# Altium PCB PCB_BrushlessDrive.PcbDoc
Units mm, origin at the board's own origin, x right, y up, seen from the top; angles counter-clockwise.
Board outline 38.28 x 56.75 mm, 4 copper layers (Top Layer, Internal Plane 1, Internal Plane 2, Bottom Layer), stack 0.778 mm thick; 13 components, 19 nets, 124 pads, 3 vias.
Unrouted connection lines stored in the file: 4.
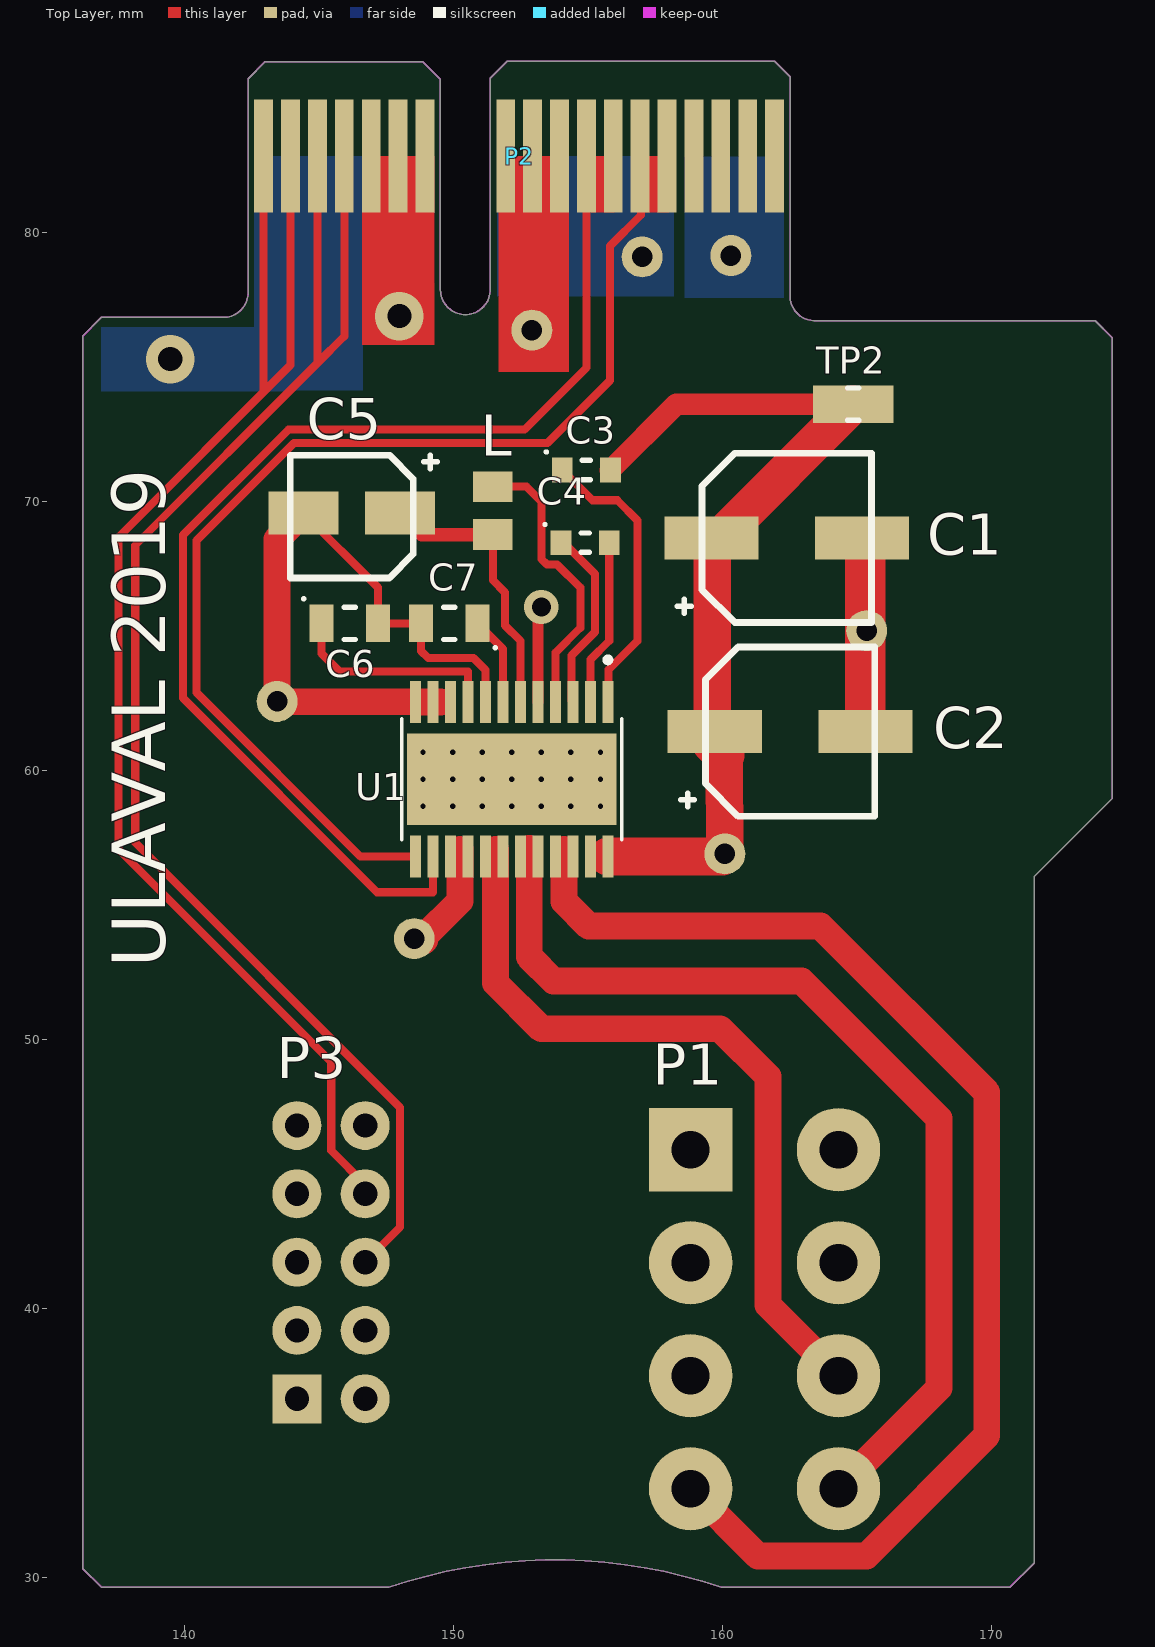
[diagram p0: Top Layer view]
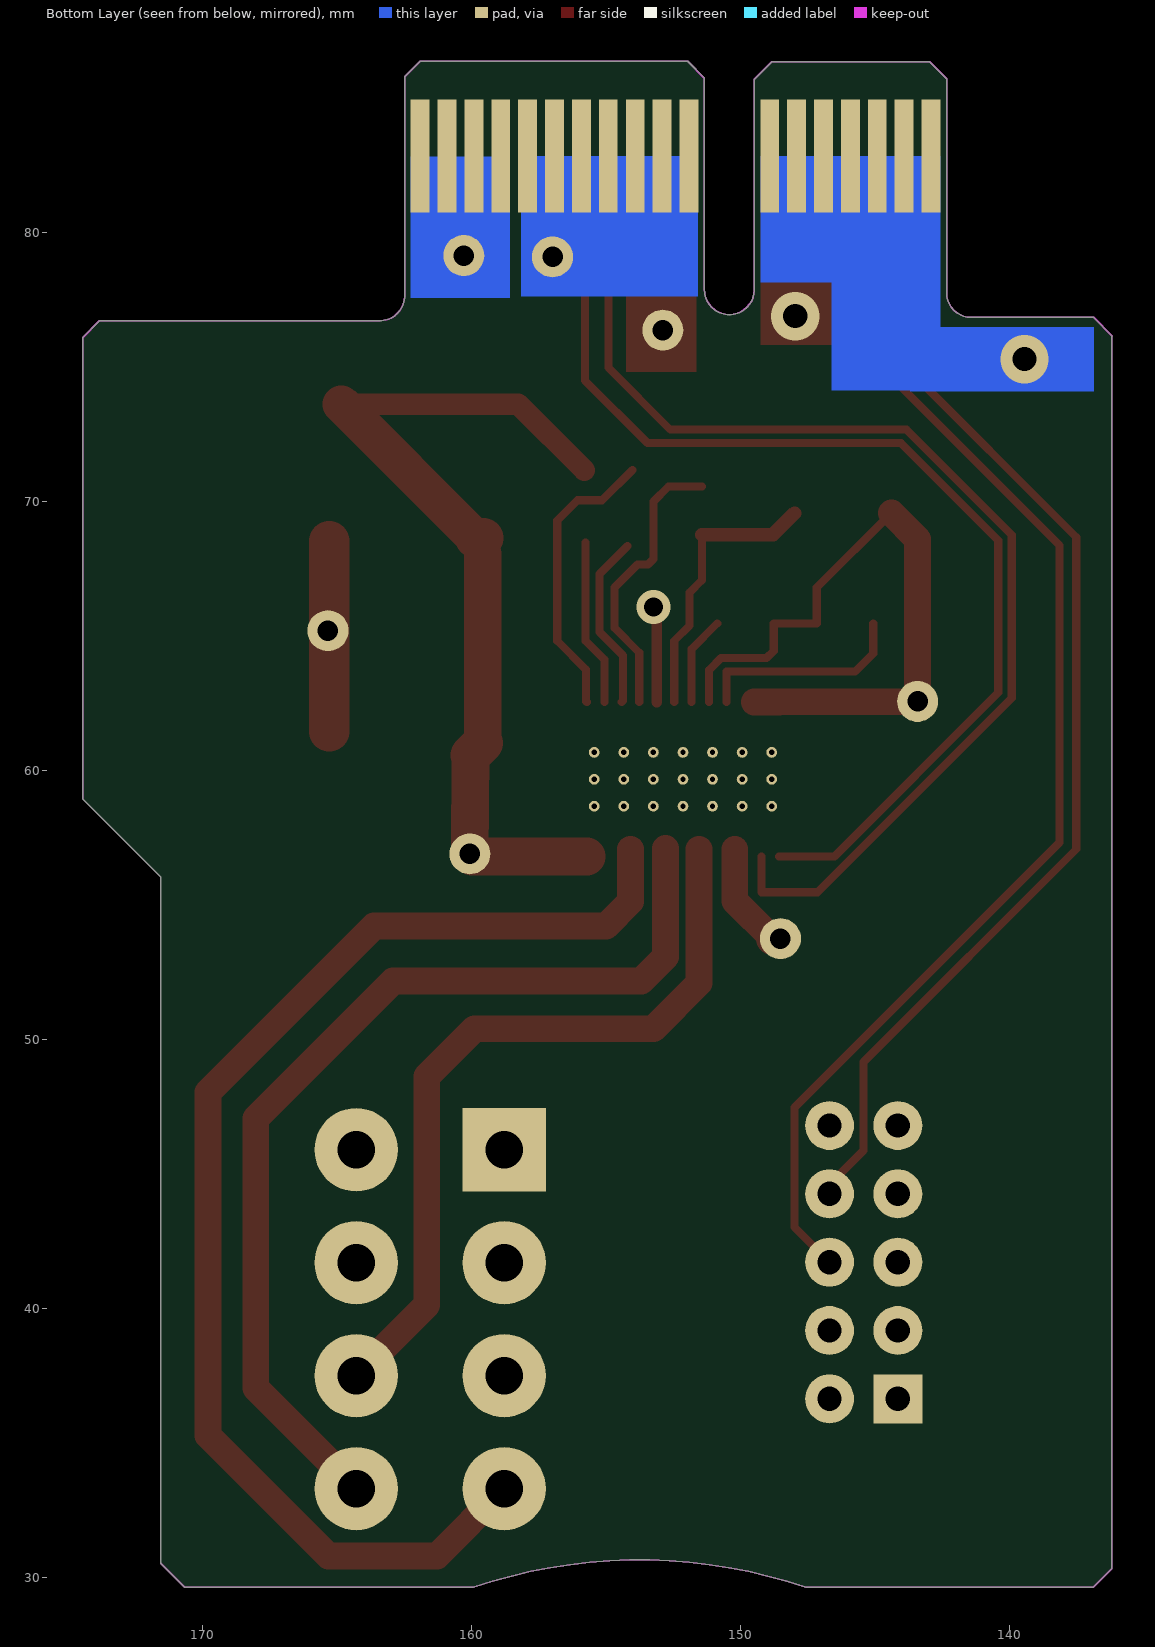
[diagram p1: Bottom Layer view, seen from below]
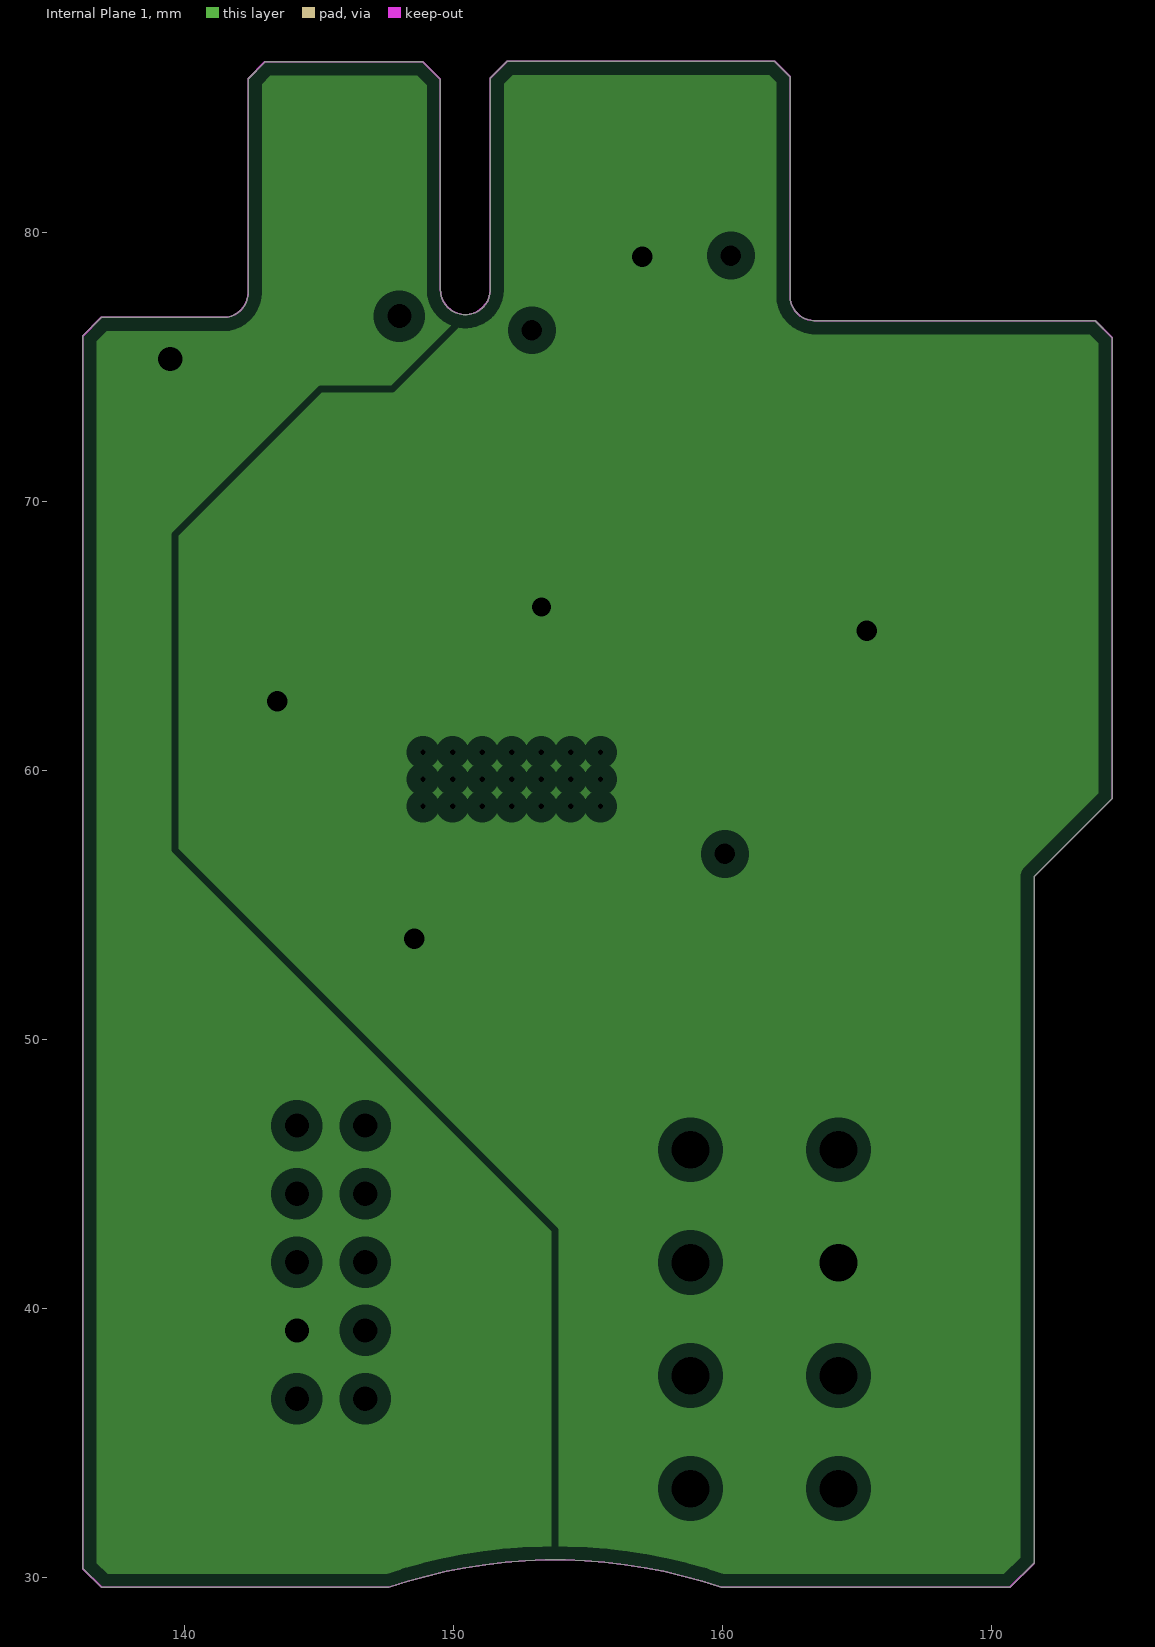
[diagram p2: Internal Plane 1, clearances drawn from the general rule]
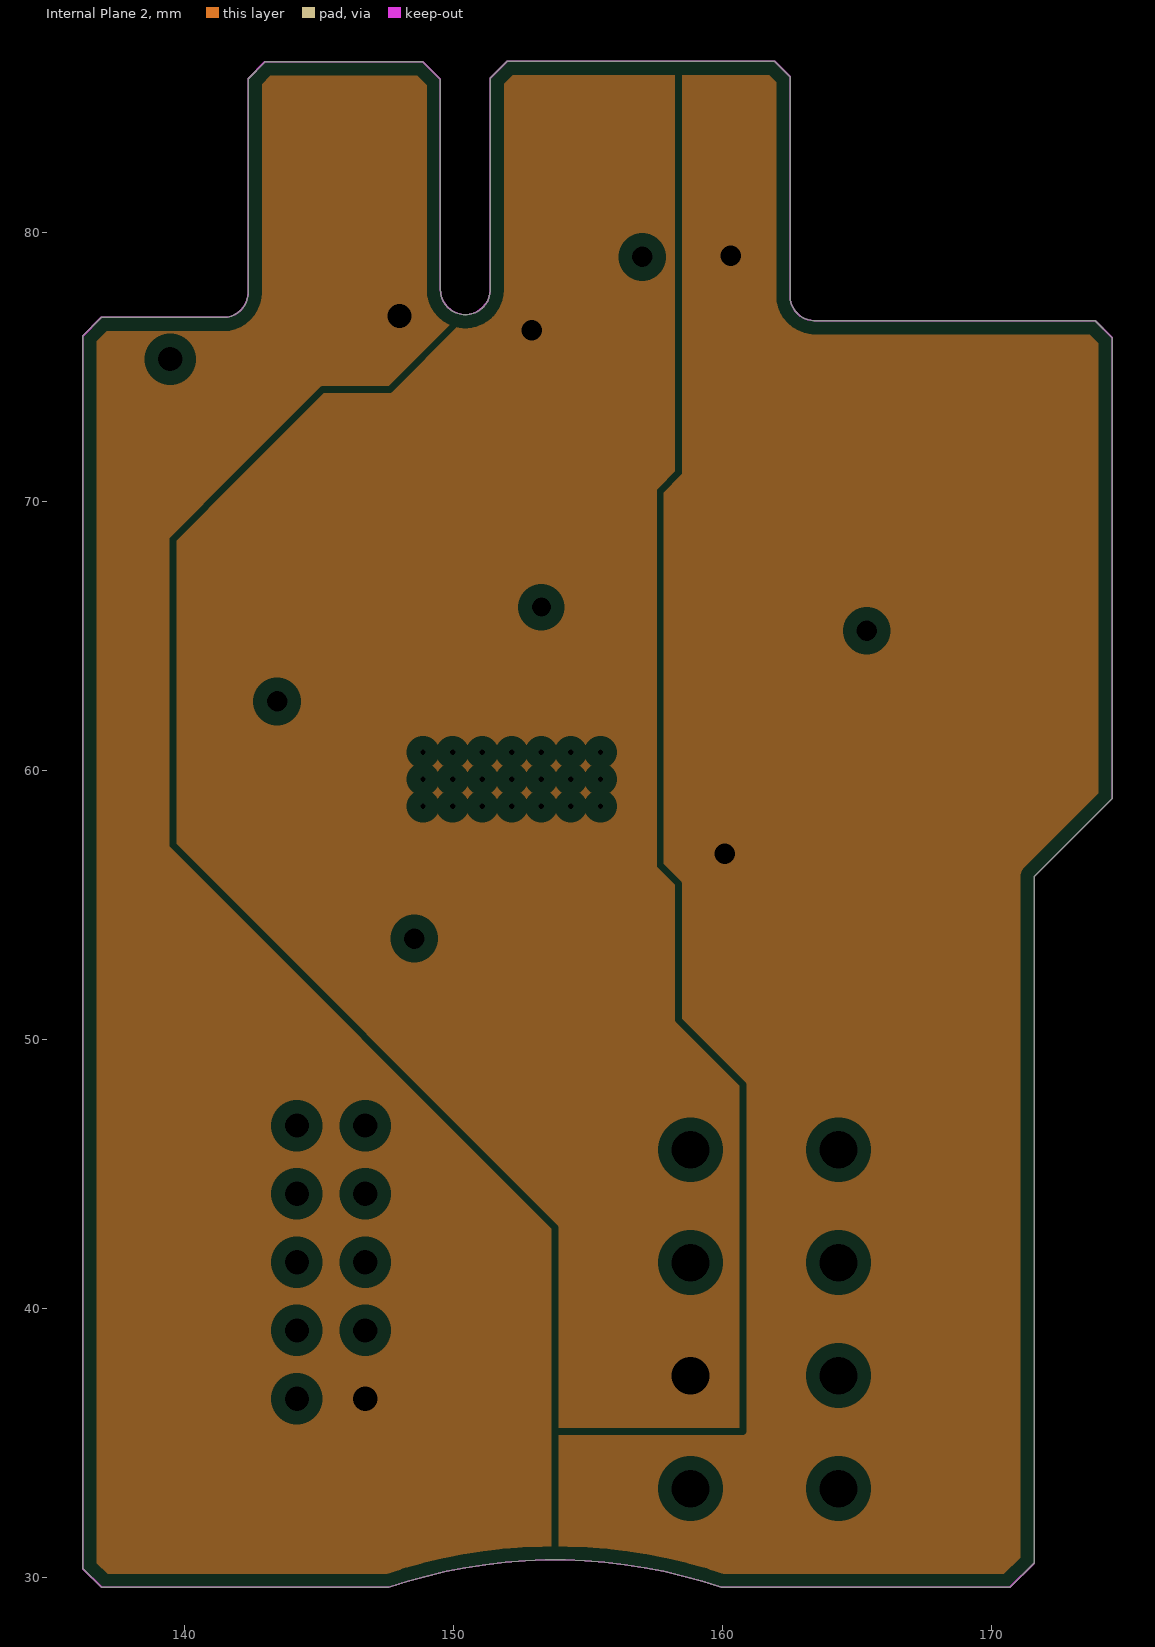
[diagram p3: Internal Plane 2, clearances drawn from the general rule]

## Layer stack, top to bottom
Top Solder: solder mask 0.0102, Solder Resist, Dk 3.5
Top Layer: signal copper 0.0356
Dielectric1: core 0.254, FR-4, Dk 4.2
Internal Plane 1: plane copper 0.036, net (Multiple Nets)
Dielectric 3: prepreg 0.127, Dk 4.2
Internal Plane 2: plane copper 0.036, net (Multiple Nets)
Dielectric 2: core 0.254, Dk 4.2
Bottom Layer: signal copper 0.0356
Bottom Solder: solder mask 0.0102, Solder Resist, Dk 3.5

## Board outline
136.2,30.325 136.9,29.625 147.575,29.625 cw(c153.763,11.462) 159.95,29.625 170.675,29.625 171.575,30.525 171.575,56.05 174.475,58.95 174.475,76.1 173.85,76.725 163.4,76.725 163.425,76.725 cw(c163.425,77.65) 162.5,77.65 162.5,77.625 162.5,85.8 161.925,86.375 151.975,86.375 151.35,85.75 151.35,77.875 cw(c150.425,77.875) 150.425,76.95 cw(c150.425,77.875) 149.5,77.875 149.5,85.7 148.85,86.35 142.975,86.35 142.35,85.725 142.35,77.775 cw(c141.425,77.775) 141.425,76.85 136.884,76.85 136.192,76.158 136.2,76.15

## Design rules (kind name [scope] priority, off if disabled: settings)
Clearance polygon [InPolygon] p1: gap=0.5 ignorepadtopadclearanceinfootprint=FALSE except(0: Arc-Hole Track-Hole SMDPad-Hole THPad-Hole Via-Hole Fill-Hole Poly-Hole Region-Hole Text-Hole)
Clearance [All] p2: gap=0.2 ignorepadtopadclearanceinfootprint=FALSE except(0: Arc-Hole Track-Hole SMDPad-Hole THPad-Hole Via-Hole Fill-Hole Poly-Hole Region-Hole Text-Hole)
PlaneClearance [All] p1: clearance=0.508
PlaneConnect [All] p1: planeconnectstyle=Relief reliefexpansion=0.508 reliefentries=4 reliefconductorwidth=0.5 reliefairgap=0.254
PolygonConnect [All] p1: connectstyle=Relief reliefconductorwidth=0.5 reliefentries=4 polygonreliefangle="90 Angle" airgapwidth=0.254
RoutingVias "RoutingVias Power" [InNet('PGND','DGND','P1','P2','P3')] p1: holewidth=1.6 width=3.2 viastyle="Through Hole" minholewidth=0.9 minwidth=1.8 maxholewidth=1.6 maxwidth=3.2
RoutingVias [All] p2: holewidth=0.6 width=1.2 viastyle="Through Hole" minholewidth=0.35 minwidth=0.7 maxholewidth=0.6 maxwidth=1.2
SolderMaskExpansion [All] p1: expansion=0.102
Width "Power width" [InNet('PGND','VPOWER','P1','P2','P3')] p1: maxlimit=5 minlimit=0.2 preferedwidth=3 minimp=50.000000 maximp=50.000000 favimp=50.000000
Width [All] p2: maxlimit=1.2 minlimit=0.3 preferedwidth=0.6
28 further rules are at their usual default settings.

## Classes and differential pairs
component class Drive: C2 C3 C4 C5 C6 C7 L TP2 U1 U?
component class BrushlessDrive: P1 P2 P3

## Components (designator, comment, footprint, x,y, rotation, side; value= is the part's Value field where it differs from the comment)
C1 "865080645012" "CAP 6.6x6.6mm" 162.375,68.65 r180 top
C2 "865080645012" "CAP 6.6x6.6mm" 162.5,61.45 r180 top
C3 "CL10B104KB8SFNC" 0603 154.925,71.175 r0 top
C4 "CL10B104KB8SFNC" 0603 154.88,68.475 r0 top
C5 "865230340001" "CAP 4.3x4.3mm" 146.2,69.575 r0 top
C6 "CL21B105KBFNFNE" 0805 146.125,65.475 r0 top
C7 "CL21B105KBFNFNE" 0805 149.825,65.475 r180 top
L "Inductor" *INDC2012X100N 151.45,69.665 r270 top value=47mH
P1 "Header 8" "HallSensor Connector" 158.8,45.9 r0 top
P2 "WM9000-ND (Male)" "Edge connector 36Pos" 161.925,82.85 r180 top
P3 "Header 5X2" "Encoder Connector" 146.7,46.8 r0 top
TP2 "testpoint" "0805 testpoint" 164.85,73.625 r180 top
U1 "DRV10983PWPR" *SOP65P640X120-25N 152.15,59.675 r270 top

## Footprints (in the part's own frame and the unit in brackets; to place one, negate y for a bottom-side part, rotate by r counter-clockwise, add the part's x,y. Pads: shape width x height; smd on the part's side, far side on the other; paste and mask are expansions set on the pad)
0603 [mm] "Chip 2-Leads, Body 1,60x0,80mm, IPC Medium Density"
  rect 0.77x0.92 smd: 1(-0.895,0) 2(0.895,0)
  silkscreen extent -1.54,-0.36 0.15,0.72, body extent -0.8,-0.4 0.8,0.4, height 1
0805 [mm] "Chip Capacitor, 2-Leads, Body 2,00x1,25mm, IPC Medium Density"
  rect 0.9x1.4 smd: 1(-1.05,0) 2(1.05,0)
  silkscreen extent -1.76,-0.6 0.2,0.96, body extent -1,-0.63 1,0.63, height 0.8
"0805 testpoint" [mm] "Chip Capacitor, 2-Leads, Body 2,00x1,25mm, IPC Medium Density"
  rect 3x1.4 smd: 1(0,0)
  silkscreen extent -0.2,-0.6 0.2,0.6, body extent -1,-0.63 1,0.63, height 0.8
*INDC2012X100N [mm]
  rect 1.14x1.47 smd: 1(-0.89,0) 2(0.89,0)
*SOP65P640X120-25N [mm]
  rect 1.57x0.41 smd: 1(-2.87,3.575) 2(-2.87,2.925) 3(-2.87,2.275) 4(-2.87,1.625) 5(-2.87,0.975) 6(-2.87,0.325) 7(-2.87,-0.325) 8(-2.87,-0.975) 9(-2.87,-1.625) 10(-2.87,-2.275) 11(-2.87,-2.925) 12(-2.87,-3.575) 13(2.87,-3.575) 14(2.87,-2.925) 15(2.87,-2.275) 16(2.87,-1.625) 17(2.87,-0.975) 18(2.87,-0.325) 19(2.87,0.325) 20(2.87,0.975) 21(2.87,1.625) 22(2.87,2.275) 23(2.87,2.925) 24(2.87,3.575)
  rect 3.4x7.8 smd: 25(0,0)
  round 0.4 hole 0.2: V1(0,0) V2(-1,0) V3(1,0) V4(-1,1.1) V5(-1,2.2) V6(-1,3.3) V7(0,1.1) V8(0,2.2) V9(0,3.3) V10(1,1.1) V11(1,2.2) V12(1,3.3) V13(-1,-1.1) V14(-1,-2.2) V15(-1,-3.3) V16(0,-1.1) V17(0,-2.2) V18(0,-3.3) V19(1,-1.1) V20(1,-2.2) V21(1,-3.3)
  silkscreen extent -4.54,-4.09 2.25,4.09
"CAP 4.3x4.3mm" [mm] "Chip"
  rect 2.6x1.6 smd: 1(1.8,0) 2(-1.8,0)
  silkscreen extent -2.29,-2.41 3.17,2.16, body extent -2.29,-2.28 2.31,2.02, height 3.91
"CAP 6.6x6.6mm" [mm] "Chip"
  rect 3.5x1.6 smd: 1(2.8,0) 2(-2.8,0)
  silkscreen extent -3.15,-3.15 4.06,3.15, body extent -3.15,-3.15 3.15,3.15, height 7.7
"Edge connector 36Pos" [mm] "PCI Express 36Pos 1MM gold"
  rect 0.7x4.2 smd far side: A1(0,0) A2(1,0) A3(2,0) A4(3,0) A5(4,0) A6(5,0) A7(6,0) A8(7,0) A9(8,0) A10(9,0) A11(10,0) A12(13,0) A13(14,0) A14(15,0) A15(16,0) A16(17,0) A17(18,0) A18(19,0)
  rect 0.7x4.2 smd: B1(0,0) B2(1,0) B3(2,0) B4(3,0) B5(4,0) B6(5,0) B7(6,0) B8(7,0) B9(8,0) B10(9,0) B11(10,0) B12(13,0) B13(14,0) B14(15,0) B15(16,0) B16(17,0) B17(18,0) B18(19,0)
"Encoder Connector" [mm] "Connector; Header; 5x2 Position"
  rect 1.82x1.82 hole 0.9: 1(-2.54,-10.16)
  round 1.82 hole 0.9: 2(0,-10.16) 3(-2.54,-7.62) 4(0,-7.62) 5(-2.54,-5.08) 6(0,-5.08) 7(-2.54,-2.54) 8(0,-2.54) 9(-2.54,0) 10(0,0)
"HallSensor Connector" [mm] "Connector; Header; 8 Position"
  rect 3.1x3.1 hole 1.4: 1(0,0)
  round 3.1 hole 1.4: 2(0,-4.2) 3(0,-8.4) 4(0,-12.6) 5(5.5,0) 6(5.5,-4.2) 7(5.5,-8.4) 8(5.5,-12.6)

## Part data
C1 C2: "CAP 47 UF 20% 50 V", Capacitance=47µF, ESR (Equivalent Series Resistance)=-, Lifetime @ Temp.="2000 Hrs @ 105°C", Manufacturer="Wurth Electronics Inc", Operating Temperature="-55°C ~ 105°C", Package / Case="Radial, Can - SMD", Ripple Current="230mA @ 100kHz", Supplier part number 1=732-8457-1-ND, Tolerance=±20%, Voltage Rating=50V, Applications="General Purpose", Category=Capacitors, ComponentLink1Description=http://katalog.we-online.de/pbs/datasheet/865080645012.pdf, ComponentLink1URL=http://katalog.we-online.de/pbs/datasheet/865080645012.pdf, Height - Seated (Max)="0.303\" (7.70mm)", Impedance="700 mOhm", Lead Spacing=-, Manufacturer Part Number=865080645012, Mounting Type="Surface Mount", Packaging="Cut Tape (CT)", Polarization=Polar, Pricing 1="1=0.48, 50=0.4072, 100=0.3547, 250=0.31528 (CAD)", RoHS="RoHS Compliant", Size / Dimension="0.248\" Dia (6.30mm)", Stock 1=803, Supplier 1=Digi-Key, Surface Mount Land Size="0.260\" L x 0.260\" W (6.60mm x 6.60mm)"
C3 C4: "CAP CER 0.1UF 50V X7R 0603", Capacitance=0.10µF, Manufacturer="Samsung Electro-Mechanics America, Inc.", Operating Temperature="-55°C ~ 125°C", Package / Case="0603 (1608 Metric)", Ratings=-, Supplier part number 1=445-173846-1-ND, Temperature Coefficient=X7R, Tolerance=±10%, Voltage - Rated=50V, Applications="Boardflex Sensitive", Category=Capacitors, ComponentLink1Description=http://www.samsungsem.com/kr/support/product-search/mlcc/CL10B104KB8SFNC.jsp, ComponentLink1URL=http://www.samsungsem.com/kr/support/product-search/mlcc/CL10B104KB8SFNC.jsp, Features="Soft Termination", Height - Seated (Max)=-, Lead Spacing=-, Lead Style=-, Manufacturer Part Number=CL10B104KB8SFNC, Mounting Type="Surface Mount, MLCC", Packaging="Cut Tape (CT)", RoHS="RoHS Compliant", Size / Dimension="0.063\" L x 0.031\" W (1.60mm x 0.80mm)", Supplier 1=Digi-Key, Thickness (Max)="0.035\" (0.90mm)"
C5: "CAP 10 UF 20% 16 V", Capacitance=10µF, ESR (Equivalent Series Resistance)=-, Lifetime @ Temp.="5000 Hrs @ 105°C", Manufacturer="Wurth Electronics Inc", Operating Temperature="-40°C ~ 105°C", Package / Case="Radial, Can - SMD", Ripple Current="17mA @ 100kHz", Supplier part number 1=732-8250-1-ND, Tolerance=±20%, Voltage Rating=16V, Applications="General Purpose", Category=Capacitors, ComponentLink1Description=http://katalog.we-online.de/pbs/datasheet/865230340001.pdf, ComponentLink1URL=http://katalog.we-online.de/pbs/datasheet/865230340001.pdf, Height - Seated (Max)="0.217\" (5.50mm)", Impedance=-, Lead Spacing=-, Manufacturer Part Number=865230340001, Mounting Type="Surface Mount", Packaging="Cut Tape (CT)", Polarization=Polar, Pricing 1="1=0.27, 50=0.2274, 100=0.1981, 250=0.17608, 500=0.15406, 1000=0.14673 (CAD)", RoHS="RoHS Compliant", Size / Dimension="0.157\" Dia (4.00mm)", Stock 1=1549, Supplier 1=Digi-Key, Surface Mount Land Size="0.169\" L x 0.169\" W (4.30mm x 4.30mm)"
C6 C7: "CAP CER 1UF 50V X7R 0805", Capacitance=1µF, Manufacturer="Samsung Electro-Mechanics America, Inc.", Operating Temperature="-55°C ~ 125°C", Package / Case="0805 (2012 Metric)", Ratings=-, Supplier part number 1=1276-2928-1-ND, Temperature Coefficient=X7R, Tolerance=±10%, Voltage - Rated=50V, Applications="General Purpose", Category=Capacitors, ComponentLink1Description=http://www.samsungsem.com/kr/support/product-search/mlcc/CL21B105KBFNFNE.jsp, ComponentLink1URL=http://www.samsungsem.com/kr/support/product-search/mlcc/CL21B105KBFNFNE.jsp, Features=-, Height - Seated (Max)=-, Lead Spacing=-, Lead Style=-, Manufacturer Part Number=CL21B105KBFNFNE, Mounting Type="Surface Mount, MLCC", Packaging="Cut Tape (CT)", Pricing 1="1=0.27, 10=0.186, 25=0.14, 50=0.1072, 100=0.0884, 500=0.06238, 1000=0.05123 (CAD)", RoHS="RoHS Compliant", Size / Dimension="0.079\" L x 0.049\" W (2.00mm x 1.25mm)", Stock 1=21699, Supplier 1=Digi-Key, Thickness (Max)="0.053\" (1.35mm)"
P1: "Header, 8-Pin", LatestRevisionDate=17-Jul-2002, LatestRevisionNote="Re-released for DXP Platform.", Publisher="Altium Limited"
P3: "Header, 5-Pin, Dual row", LatestRevisionDate=17-Jul-2002, LatestRevisionNote="Re-released for DXP Platform.", Publisher="Altium Limited"
TP2: "Testpoint"
L: Code_IEC=1005, Code_JEITA=0402, LatestRevisionDate=29-May-2009, LatestRevisionNote="IPC-7351 Footprint Added.", PackageDescription="Chip Inductor", PackageReference=0402-A, Published=8-Jun-2000, Publisher="Altium Limited"

## Free pads (board coordinates)
  round 1.524 hole 0.762: 1(160.075,56.9) 2(160.3,79.15) 3(157,79.1) 4(152.9,76.375) 5(165.35,65.2) 6(143.425,62.57) 7(148.525,53.75)

## Via types
v1: diameter 1.8, hole 0.9, Top Layer to Bottom Layer, 2 vias
v2: diameter 1.27, hole 0.711, Top Layer to Bottom Layer, 1 vias

## Nets (pads, with @x,y where several pads share a name; then routed paths per layer and width w, separated by ;. In a path a pad name is that pad's centre, name@x,y a point inside that pad or via, vN(x,y) a via of type N, cw(c..) or ccw(c..) an arc to the next point about the centre after c; other vN are vias at no path point)
5VA: P1.3 P2.B9 P2.B10 P2.B11 pad.4
5VD: P2.B12 P2.B13 P2.B14 P3.2
  other v1: 147.975,76.9
A: P2.B15 P2.B16 P3.6 | length 56.7
  Top Layer w0.3: P2.B16 144.925,75.15 ; P2.B15 145.925,76.15 144.925,75.15 ; P3.6 148,43.02 148,47.475 138.15,57.325 138.15,68.375 144.925,75.15
B: P2.B17 P2.B18 P3.8 | length 53.3
  Top Layer w0.3: 142.925,74.075 P2.B18 ; P2.B17@143.925,82.35 143.925,75.075 137.525,68.675 137.525,57.075 145.44,49.16 145.44,45.868 146.7,44.608 P3.8
CTRL: P2.B5 P2.B6 U1.13 | length 43
  Top Layer w0.3: U1.13 146.52,56.805 140.425,62.9 140.425,68.55 144.05,72.175 153.475,72.175 155.8,74.5 155.8,79.5 156.95,80.65 156.95,82.825 P2.B6
DGND: P2.A12 P2.A13 P2.A14 P2.A15 P2.A16 P2.A17 P2.A18 P3.3
  other v1: 139.45,75.3
DIR: P2.B7 P2.B8 U1.14 | length 45.1
  Top Layer w0.3: U1.14 149.225,55.475 147.143,55.475 139.925,62.693 139.925,68.757 143.843,72.675 152.62,72.675 154.925,74.98 P2.B8
NetC3_1: C3.1 U1.1 | length 10.8
  Top Layer w0.3: C3.1 155.155,70.05 156.075,70.05 156.825,69.3 156.825,64.825 155.75,63.75 155.75,62.57 U1.1
NetC4_1: C4.1 U1.3 | length 6.6
  Top Layer w0.3: C4.1@154.21,68.35 155.25,67.31 155.25,65.15 154.375,64.275 154.375,62.595 U1.3
NetC4_2: C4.2 U1.2 | length 6.2
  Top Layer w0.3: U1.2 155.075,64.125 155.775,64.825 C4.2
NetC5_1: C5.1 L.2 U1.6 | length 10.4
  Top Layer w0.3: L.2 151.45,67.075 151.9,66.625 151.9,65.4 152.475,64.825 U1.6
  Top Layer w0.5: C5.1 148.8,68.775 L.2
NetC6_1: C6.1 U1.9 | length 8
  Top Layer w0.3: C6.1 145.075,64.35 145.745,63.68 150.525,63.68 U1.9
NetC7_1: C7.1 U1.7 | length 3.3
  Top Layer w0.3: C7.1 151.825,64.525 U1.7
NetL_1: L.1 U1.4 | length 10.7
  Top Layer w0.3: L.1 152.695,70.555 153.25,70 153.25,67.87 153.455,67.665 153.835,67.665 154.7,66.8 154.7,65.307 153.775,64.382 U1.4
P1: P1.7 U1.17 U1.18 | length 28.8
  Top Layer w1: 151.55,57.075 151.55,52.1 153.25,50.4 159.9,50.4 161.675,48.625 161.675,40.125 P1.7
P2: P1.8 U1.19 U1.20 | length 37.1
  Top Layer w1: 152.8,57.1 152.8,56.805 152.8,53.075 153.7,52.175 162.925,52.175 168.037,47.063 168.037,37.037 P1.8
P3: P1.4 U1.21 U1.22 | length 47.3
  Top Layer w1: 154.1,57.075 154.1,55.125 155.012,54.213 163.637,54.213 169.812,48.038 169.812,35.276 165.336,30.8 161.3,30.8 P1.4
PGND: C1.2 C2.2 C5.2 C6.2 C7.2 P1.6 P2.A5 P2.A6 P2.A7 P2.A8 P2.A9 P2.A10 P2.A11 pad.3 pad.5 pad.6 pad.7 U1.5 U1.8 U1.10 U1.11 U1.12 U1.15 U1.16 | length 40.6
  Top Layer w0.2: C1.2 C1.2@165.3,68.525
  Top Layer w0.3: C5.2 147.175,66.8 C6.2 C7.2 148.775,64.45 149.045,64.18 150.732,64.18 151.175,63.737 U1.8 ; v2@153.25,65.7 v2(153.25,66.075)
  Top Layer w0.4: U1.5 v2@153.125,66.075
  Top Layer w1: C5.2 143.425,68.6 pad.6 U1.12 U1.11 149.5,62.545 ; pad.7@148.825,53.75 150.225,55.15 150.225,57.075
  Top Layer w1.2: pad.7 pad.7@148.825,53.75
  Top Layer w1.5: C2.2 C1.2@165.3,68.525
VPOWER: C1.1 C2.1 C3.2 P2.A1 P2.A2 P2.A3 P2.A4 P2.B1 P2.B2 P2.B3 P2.B4 pad.1 pad.2 TP2.1 U1.23 U1.24 | length 33.1
  Top Layer w0.2: pad.1@159.98,56.805 pad.1
  Top Layer w0.8: C3.2 158.27,73.625 TP2.1
  Top Layer w1.4: U1.24 pad.1@159.98,56.805 ; C2.1@159.6,61.025 C1.1@159.6,68.05 ; C1.1@159.875,68.65 TP2.1 ; 160.05,60.575 pad.1
  Top Layer w1.5: C1.1 C1.1@159.875,68.65 ; C2.1@159.6,61.025 160.05,60.575
pads on no net: P1.1 P1.2 P1.5 P3.1 P3.4 P3.5 P3.7 P3.9 P3.10 U1.25 U1.V1 U1.V2 U1.V3 U1.V4 U1.V5 U1.V6 U1.V7 U1.V8 U1.V9 U1.V10 U1.V11 U1.V12 U1.V13 U1.V14 U1.V15 U1.V16 U1.V17 U1.V18 U1.V19 U1.V20 U1.V21

## Polygon pours and split planes (outlines as drawn)
PGND on Internal Plane 1 (split plane): 161.99,85.589 161.99,77.625 161.993,77.587 161.999,77.489 162.026,77.331 162.07,77.176 162.132,77.027 162.21,76.886 162.303,76.755 162.41,76.635 162.53,76.528 162.661,76.435 162.802,76.357 162.951,76.295 163.106,76.251 163.264,76.224 163.362,76.218 163.4,76.215 163.425,76.215 173.639,76.215 173.965,75.889 173.965,59.161 171.214,56.411 171.151,56.334 171.103,56.245 171.074,56.15 171.065,56.05 171.065,30.736 170.464,30.135 160.027,30.135 159.85,30.196 159.258,30.378 158.661,30.542 158.06,30.686 157.454,30.812 156.844,30.918 156.231,31.005 155.616,31.073 154.999,31.122 154.381,31.151 153.892,31.158 153.892,42.912 153.882,42.962 153.854,43.004 139.754,57.104 139.754,68.721 142.198,71.165 145.097,74.064 147.718,74.064 147.768,74.074 147.81,74.102 150.172,76.464 150.264,76.449 150.42,76.44 150.425,76.44 150.43,76.44 150.586,76.449 150.744,76.476 150.899,76.52 151.048,76.582 151.189,76.66 151.32,76.753 151.44,76.86 151.547,76.98 151.64,77.111 151.718,77.252 151.78,77.401 151.824,77.556 151.851,77.714 151.86,77.87 151.86,77.875 151.86,85.539 152.186,85.865 161.714,85.865
DGND on Internal Plane 1 (split plane): 148.99,85.489 148.99,77.875 148.99,77.87 148.999,77.714 149.026,77.556 149.07,77.401 149.132,77.252 149.21,77.111 149.303,76.98 149.41,76.86 149.53,76.753 149.661,76.66 149.802,76.582 149.888,76.546 147.665,74.323 145.043,74.323 144.994,74.313 144.952,74.285 142.015,71.348 139.533,68.867 139.505,68.825 139.496,68.775 139.496,57.05 139.505,57 139.533,56.958 153.633,42.859 153.633,31.158 153.144,31.151 152.526,31.122 151.909,31.073 151.294,31.005 150.681,30.918 150.071,30.812 149.465,30.686 148.864,30.542 148.267,30.378 147.675,30.196 147.498,30.135 137.111,30.135 136.71,30.536 136.71,75.955 137.095,76.34 141.425,76.34 141.43,76.34 141.586,76.349 141.744,76.376 141.899,76.42 142.048,76.482 142.189,76.56 142.32,76.653 142.44,76.76 142.547,76.88 142.64,77.011 142.718,77.152 142.78,77.301 142.824,77.456 142.851,77.614 142.86,77.77 142.86,77.775 142.86,85.514 143.186,85.84 148.639,85.84
5VA on Internal Plane 2 (split plane): 158.221,71.129 157.583,70.492 157.555,70.45 157.546,70.4 157.546,56.475 157.555,56.425 157.583,56.383 158.221,55.746 158.221,50.725 158.23,50.675 158.258,50.633 160.621,48.271 160.621,35.554 153.892,35.554 153.892,43.012 153.882,43.062 153.854,43.104 139.679,57.279 139.679,68.546 142.106,70.973 145.172,74.039 147.618,74.039 147.668,74.048 147.71,74.076 150.108,76.475 150.264,76.449 150.42,76.44 150.425,76.44 150.43,76.44 150.586,76.449 150.744,76.476 150.899,76.52 151.048,76.582 151.189,76.66 151.32,76.753 151.44,76.86 151.547,76.98 151.64,77.111 151.718,77.252 151.78,77.401 151.824,77.556 151.851,77.714 151.86,77.87 151.86,77.875 151.86,85.539 152.186,85.865 158.221,85.865
VPOWER on Internal Plane 2 (split plane): 161.99,85.589 161.99,77.625 161.993,77.587 161.999,77.489 162.026,77.331 162.07,77.176 162.132,77.027 162.21,76.886 162.303,76.755 162.41,76.635 162.53,76.528 162.661,76.435 162.802,76.357 162.951,76.295 163.106,76.251 163.264,76.224 163.362,76.218 163.4,76.215 163.425,76.215 173.639,76.215 173.965,75.889 173.965,59.161 171.214,56.411 171.151,56.334 171.103,56.245 171.074,56.15 171.065,56.05 171.065,30.736 170.464,30.135 160.027,30.135 159.85,30.196 159.258,30.378 158.661,30.542 158.06,30.686 157.454,30.812 156.844,30.918 156.231,31.005 155.616,31.073 154.999,31.122 154.381,31.151 153.892,31.158 153.892,35.296 160.75,35.296 160.8,35.305 160.842,35.333 160.87,35.375 160.879,35.425 160.879,48.325 160.87,48.375 160.842,48.417 158.479,50.779 158.479,55.8 158.47,55.85 158.442,55.892 157.804,56.529 157.804,70.346 158.442,70.983 158.47,71.025 158.479,71.075 158.479,85.865 161.714,85.865
5VD on Internal Plane 2 (split plane): 148.99,85.489 148.99,77.875 148.99,77.87 148.999,77.714 149.026,77.556 149.07,77.401 149.132,77.252 149.21,77.111 149.303,76.98 149.41,76.86 149.53,76.753 149.661,76.66 149.802,76.582 149.835,76.568 147.564,74.298 145.118,74.298 145.068,74.288 145.026,74.26 141.923,71.156 139.458,68.692 139.43,68.65 139.421,68.6 139.421,57.225 139.43,57.175 139.458,57.133 153.633,42.959 153.633,31.158 153.144,31.151 152.526,31.122 151.909,31.073 151.294,31.005 150.681,30.918 150.071,30.812 149.465,30.686 148.864,30.542 148.267,30.378 147.675,30.196 147.498,30.135 137.111,30.135 136.71,30.536 136.71,75.955 137.095,76.34 141.425,76.34 141.43,76.34 141.586,76.349 141.744,76.376 141.899,76.42 142.048,76.482 142.189,76.56 142.32,76.653 142.44,76.76 142.547,76.88 142.64,77.011 142.718,77.152 142.78,77.301 142.824,77.456 142.851,77.614 142.86,77.77 142.86,77.775 142.86,85.514 143.186,85.84 148.639,85.84

## Keep-outs
Keep-Out Layer:
  lines w0.05: 136.192,76.158 136.884,76.85 141.425,76.85 ccw(c141.425,77.775) 142.35,77.775 142.35,85.725 142.975,86.35 148.85,86.35 149.5,85.7 149.5,78.425 149.5,77.9 149.5,77.875 ccw(c150.425,77.875) 150.425,76.95 ccw(c150.425,77.875) 151.35,77.875 151.35,85.75 151.975,86.375 161.925,86.375 162.5,85.8 162.5,77.625 ; 136.2,76.15 136.2,30.325 136.9,29.625 147.575,29.625 cw(c153.763,11.462) 159.95,29.625 170.675,29.625 171.575,30.525 ; 162.5,77.65 ccw(c163.425,77.65) 163.425,76.725 ; 163.4,76.725 173.85,76.725 174.475,76.1 174.475,73.85 174.475,71.525 174.475,58.95

## Other copper
Top Layer:
  rectangle net CTRL: 156.925,80.75 158,82.85
  rectangle net DIR: 154.925,80.75 155.975,82.85
  rectangle net 5VA: 151.65,74.825 154.275,82.85
  rectangle net 5VD: 146.575,75.825 149.275,82.85
Bottom Layer:
  rectangle net VPOWER: 158.575,77.575 162.275,82.825
  rectangle net PGND: 151.6,77.625 158.175,82.85
  rectangle net DGND: 142.575,78.15 149.275,82.85
  rectangle net DGND: 142.575,74.125 146.625,78.15
  rectangle net DGND: 136.875,74.1 143.7,76.5
Internal Plane 1 (plane layer: these items are gaps in the copper):
  lines w0.254: 150.2,76.675 147.718,74.193 145.043,74.193 142.106,71.256 139.625,68.775 139.625,57.05 153.763,42.912 153.763,30.637
Internal Plane 2 (plane layer: these items are gaps in the copper):
  lines w0.254: 150.082,76.632 147.618,74.168 145.118,74.168 142.014,71.064 139.55,68.6 139.55,57.225 153.763,43.012 153.763,30.937 ; 153.763,35.425 160.75,35.425 160.75,48.325 158.35,50.725 158.35,55.8 157.675,56.475 157.675,70.4 158.35,71.075 158.35,86.4

## Silkscreen, mask and mechanical layers (free items; w line width, h text height)
Top Overlay:
  text "ULAVAL 2019" at 139.275,52.675 h2 r90